# Altium PCB PCB1.PcbDoc
Units mil, origin at the board's own origin, x right, y up, seen from the top; angles counter-clockwise.
Board outline 4165 x 1725 mil, 2 copper layers (Top Layer, Bottom Layer); 14 components, 8 nets, 28 pads, 0 vias.
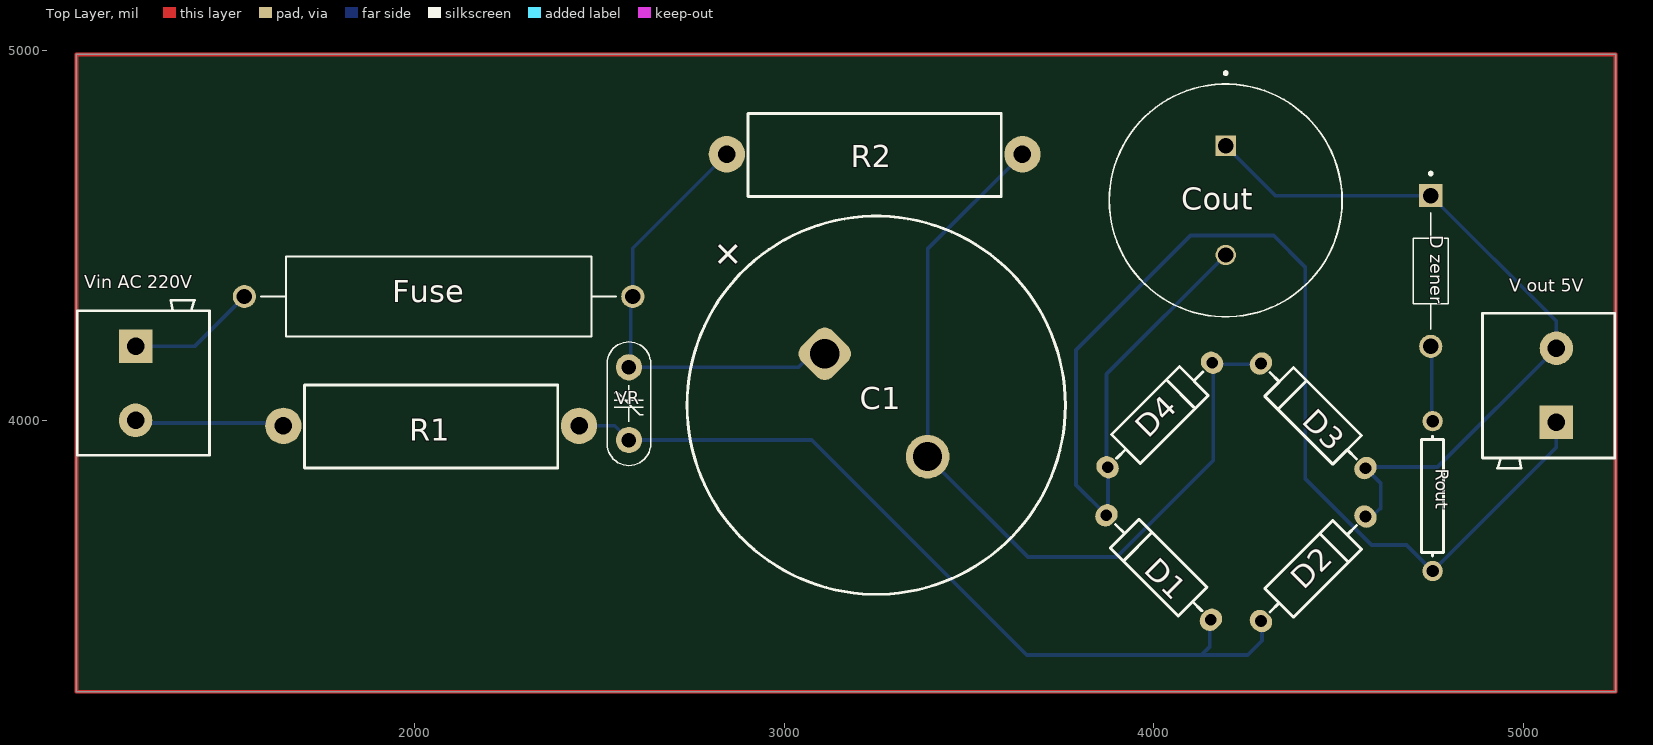
[diagram p0: Top Layer view]
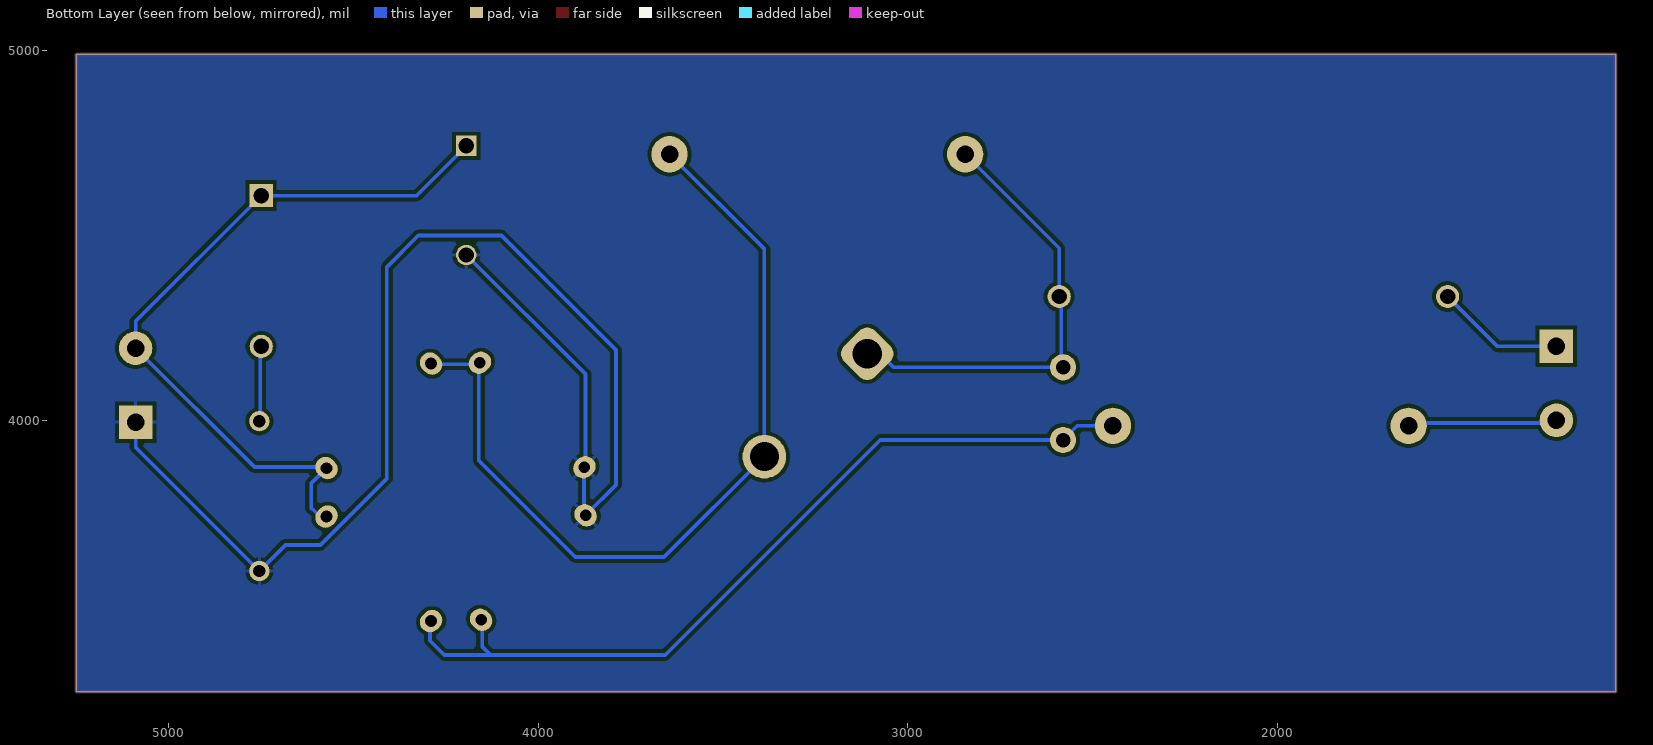
[diagram p1: Bottom Layer view, seen from below]
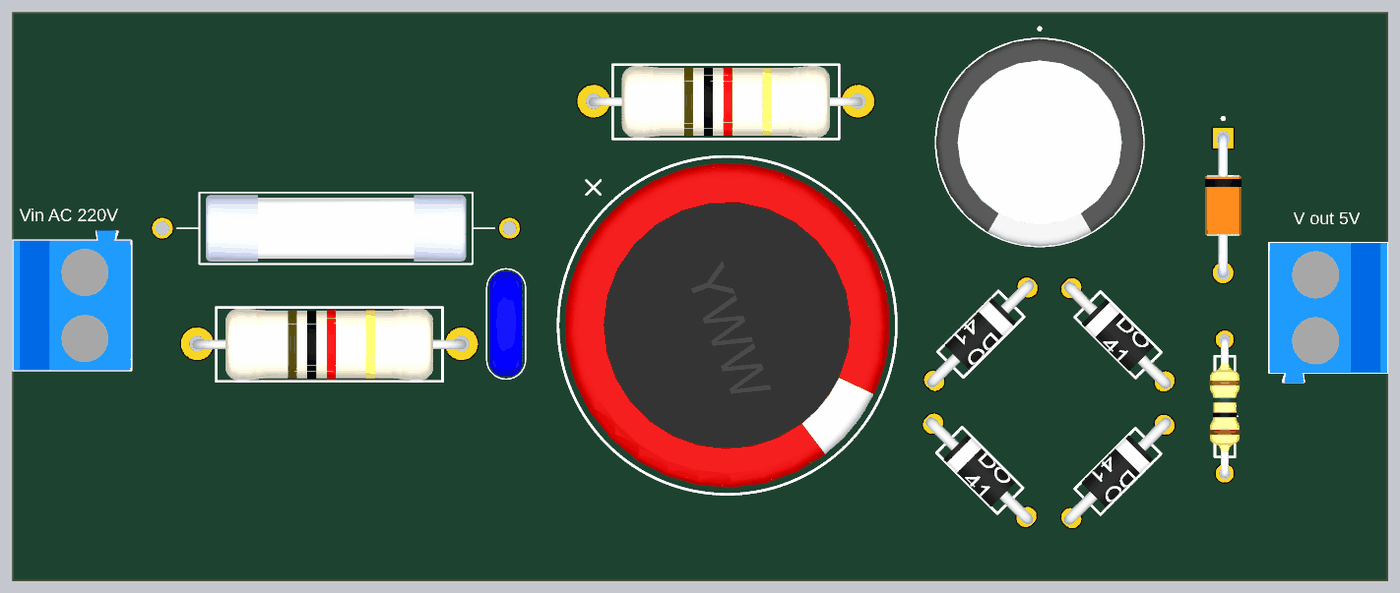
[diagram p2: 3D render of the assembled board from above, using the file's embedded part models]

## Layer stack, top to bottom
Top Solder: solder mask 0.4, Solder Resist, Dk 3.5
Top Layer: signal copper 1.4
Dielectric 1: dielectric 12.6, FR-4, Dk 4.8
Bottom Layer: signal copper 1.4
Bottom Solder: solder mask 0.4, Solder Resist, Dk 3.5

## Board outline
1085,3265 1085,4990 5250,4990 5250,3265

## Design rules (kind name [scope] priority, off if disabled: settings)
Clearance [All] p1: gap=10 ignorepadtopadclearanceinfootprint=FALSE
PolygonConnect [All] p1: connectstyle=Relief reliefconductorwidth=10 reliefentries=4 polygonreliefangle="90 Angle" airgapwidth=10
RoutingVias [All] p1: holewidth=28 width=19.68 viastyle="Through Hole" minholewidth=28 minwidth=11.81 maxholewidth=28 maxwidth=15.75
SolderMaskExpansion [All] p1: expansion=4 istentingtop=FALSE
SupplyNets "Schematic Supply Nets" [InNet('GND')] p1: voltage=0.000
Width [All] p1: maxlimit=10 minlimit=10 preferedwidth=10
30 further rules are at their usual default settings.

## Components (designator, comment, footprint, x,y, rotation, side; value= is the part's Value field where it differs from the comment)
C1 "680µF" WCAP-AIG8_D25H30 3249.19,4040.81 r135 top
Cout "EEUFR1H102" CAPPRD750W80D1600H2500 4195,4595 r270 top
D1 "1N4007 THD" D_AX04_DO41 4013.58,3601.42 r135 top value=1N4007
D2 "1N4007 THD" D_AX04_DO41 4431.84,3598.1 r45 top value=1N4007
D3 "1N4007 THD" D_AX04_DO41 4431.84,4012.15 r135 top value=1N4007
D4 "1N4007 THD" D_AX04_DO41 4016.87,4014.3 r45 top value=1N4007
"D zener" "1N4733G" DIOAD1036W73L450D282 4750,4403.94 r270 top
Fuse "fuse" FUSAD2668W81L2100D550 2065,4335 r0 top
R1 "Resistor THD" R2W_AX08 2045,3985 r0 top value=100
R2 "Resistor THD" R2W_AX08 3245,4720 r0 top value=470K
Rout "Resistor THD" Res_0.25w 4755,3795 r90 top value=100
"V out 5V" "Socket Blue 2" "Socket Blue 2" 5090,4095 r90 top
"Vin AC 220V" "Socket Blue 2" "Socket Blue 2" 1245,4100 r270 top
VR "VARISTOR" "07D XXX" 2580,4045 r270 top

## Footprints (in the part's own frame and the unit in brackets; to place one, negate y for a bottom-side part, rotate by r counter-clockwise, add the part's x,y. Pads: shape width x height; smd on the part's side, far side on the other; paste and mask are expansions set on the pad)
"07D XXX" [mm] "MOV-07DxxxK Metal Oxide Varistors (MOVs) are 7 mm  (Make www.tarahiboard.com)"
  round 1.8 hole 1: 1(2.5,0) 2(-2.5,0)
  silkscreen extent -4.25,-1.5 4.25,1.5, body extent -4,-1.26 4,1.25, height 11
CAPPRD750W80D1600H2500 [mm]
  round 1.4 hole 1.05: N(3.75,0)
  rect 1.4x1.4 hole 1.05: P(-3.75,0)
  silkscreen extent -8.85,-8 8,8, body extent -8,-8 8,8, height 25
D_AX04_DO41 [mm] "DIODE 0.4 INCH SPACING DO-41 (Make www.tarahiboard.com)"
  oval 1.4x1.6 hole 0.8: 1(-5.08,0) 2(5.08,0)
  silkscreen extent -4.2,-1.4 4.2,1.4, body extent -5.68,-1.32 5.68,1.4, height 2.86
DIOAD1036W73L450D282 [mm]
  round 1.59 hole 1.06: A(5.18,0)
  rect 1.59x1.59 / inner round 1.59 / far side rect 1.59x1.59 hole 1.06: C(-5.18,0)
  silkscreen extent -6.8,-1.2 4,1.2, body extent -5.55,-1.4 5.55,1.4, height 2.8
FUSAD2668W81L2100D550 [mm]
  round 1.59 hole 1.06: 1(-13.347,0) 2(13.347,0)
  silkscreen extent -12.2,-2.75 12.2,2.75, body extent -10,-2.55 10,2.55, height 5.1
R2W_AX08 [mm] "RESISTOR 2 WATT, AXIAL0.8 (Make www.tarahiboard.com)"
  round 2.5 hole 1.2: 1(-10.16,0) 2(10.16,0)
  silkscreen extent -8.7,-2.9 8.7,2.8, body extent -10.51,-2.8 10.51,2.7, height 5.5
Res_0.25w [mm] "(Make www.tarahiboard.com)"
  round 1.4 hole 0.85: 1(-5.155,0) 2(5.15,0)
  silkscreen extent -4.11,-0.76 4.11,0.76, body extent -5.46,-1.16 5.31,1.16, height 2.93
"Socket Blue 2" [mm] "(Make www.tarahiboard.com)"
  rect 2.3x2.3 hole 1.2: 1(-2.54,0)
  round 2.3 hole 1.2: 2(2.54,0)
  silkscreen extent -5.71,-4.01 4.95,5.08, body extent -5.78,-3.99 4.96,5.08, height 12.52
WCAP-AIG8_D25H30 [mm] "Aluminium Electrolytic Snap-In Capacitors, 25x30mm"
  rrect50% 3x3 hole 2: 1(5,0)
  round 3 hole 2: 2(-5,0)
  silkscreen extent -13,-13 13,13, body extent -17.68,-17.68 17.68,17.67, height 30.19

## Part data
C1: library part 861011084015, "WCAP-AIG8 Aluminum Electrolytic Capacitor, Snap-In, D25 x H30mm, 680µF, 200V", Capacitance Tolerance=+/-20%, Case/Size Code="D25 x H30mm", Leakage Current=2720µA, Manufacturer="Wurth Elektronik", Max Operating Temperature=85°C, Min Operating Temperature=-25°C, Rated Voltage (DC)=200V, Ripple Current=2.98A, Capacitance=680µF, Category="Aluminum Electrolytic Capacitors", ComponentLink1Description="Website Link", ComponentLink1URL=https://www.we-online.com/redexpert/article/861011084015?ad, ComponentLink2Description="Datasheet Link", ComponentLink2URL=https://www.we-online.com/redexpert/spec/861011084015?ad, Diameter=25mm, Dissipation Factor=15%, Endurance=2000h, Height=30mm, Manufacturer Part Number=861011084015, Match Code=WCAP-AIG8, Mount="Through Hole", Packaging=Tray, Technical Reference=ANAO300681M200DSIC3B000
Cout: "1000ÂµF 50V Aluminum Electrolytic Capacitors Radial, Can 10000 Hrs @ 105Â°C", Package="RADIAL-2 Panasonic", Availability="In Stock", Check_prices=https://www.snapeda.com/parts/EEUFR1H102/Panasonic/view-part/2301894/?ref=eda, MF=Panasonic, MP=EEUFR1H102, Price=None, SnapEDA_Link=https://www.snapeda.com/parts/EEUFR1H102/Panasonic/view-part/2301894/?ref=snap
D1 D2 D3 D4: "DIODE, GENERAL PURPOSE, 1000V/1A", ComponentLink1Description=Tarahiboard, ComponentLink1URL=https://www.tarahiboard.com/product/library-pack, DatasheetVersion=2022
"D zener": Package=None, Availability=Unavailable, MP=1N4733G, Price=None
Fuse: library part 5SFP-1-R, "1 A 250 V AC DC Fuse Cartridge, Glass Through Hole 5mm x 20mm (Axial)", Package="5mm-20 Bel Fuse Inc.", Check_prices=https://www.snapeda.com/parts/5SFP%201-R/Bel+Circuit+Protection/view-part/?ref=eda, MF="Bel Fuse", MP="5SFP 1-R", SnapEDA_Link=https://www.snapeda.com/parts/5SFP%201-R/Bel+Circuit+Protection/view-part/?ref=snap
VR: library part "VARISTOR (VDR)", "VARISTORS", ComponentLink1Description=Tarahiboard, ComponentLink1URL=https://www.tarahiboard.com/product/library-pack, DatasheetVersion=2022
R1 R2 Rout: ComponentLink1Description="Website: Tarahiboard", ComponentLink1URL=https://www.tarahiboard.com/product/library-pack, DatasheetVersion=2022
"V out 5V" "Vin AC 220V": ComponentLink1Description=Tarahiboard, ComponentLink1URL=https://www.tarahiboard.com/product/library-pack, DatasheetVersion=2022

## Nets (pads, with @x,y where several pads share a name; then routed paths per layer and width w, separated by ;. In a path a pad name is that pad's centre, name@x,y a point inside that pad or via, vN(x,y) a via of type N, cw(c..) or ccw(c..) an arc to the next point about the centre after c; other vN are vias at no path point)
GND: "V out 5V.1" Cout.N D1.2 D4.1 Rout.1 | length 3670.9
  Bottom Layer w10: Cout.N 3872.66,4125.03 3872.66,3875.66 D4.1 3876.59,3871.74 3876.59,3747.27 D1.2 3790,3825 3790,4190 4100,4500 4325,4500 4409.96,4415.04 4409.96,3842.64 4589.91,3662.68 4684.37,3662.68 Rout.1 4755,3595 4757.95,3595 5090,3927.05 5090,3995
NetC1_1: C1.1 Fuse.2 R2.1 VR.2 | length 1231.5
  Bottom Layer w10: R2.1 2590.49,4465.49 Fuse.2 2585.25,4329.75 2585.25,4148.67 VR.2 3038.74,4143.43 3075.31,4180 C1.1
NetC1_2: C1.2 D3.2 D4.2 R2.2 | length 2314.3
  Bottom Layer w10: R2.2 3388.39,4463.39 C1.2 3660,3630 3900,3630 4161.08,3891.08 D4.2@4161.08,4152.94 ; D4.2 4162.15,4151.86 4288.71,4151.86 D3.2
NetCout_P: "D zener.C" "V out 5V.2" Cout.P D2.2 D3.1 | length 1993.3
  Bottom Layer w10: Cout.P 4329.76,4607.87 4750,4607.87 5090,4267.87 5090,4195 4768.51,3873.51 4576.04,3873.51 D3.1 4615,3828.98 4615,3760.86 4612.11,3760.86 4590.78,3739.53 D2.2
NetD1_1: D1.1 D2.1 R1.2 VR.1 | length 2281.2
  Bottom Layer w10: R1.2 2541.57,3985 VR.1 3074.95,3946.57 3656.52,3365 4129.14,3365 ; D1.1 4152.22,3457.22 4152.22,3388.07 4129.14,3365 ; D2.1 4293.2,3453.9 4293.2,3403.2 4255,3365 4129.14,3365
"NetD zener_A": "D zener.A" Rout.2 | length 204.3
  Bottom Layer w10: 4750,4200 4752.5,4197.5 4752.5,4000.26 Rout.2
NetFuse_1: "Vin AC 220V.1" Fuse.1 | length 350.4
  Bottom Layer w10: 1245,4200 1404.51,4200 Fuse.1
NetR1_1: "Vin AC 220V.2" R1.1 | length 406.2
  Bottom Layer w10: 1245,4000 1252.5,3992.5 1637.5,3992.5 R1.1
copper on no net: | length 11780
  Top Layer w10: 1085,3265 5250,3265 5250,4990 1085,4990 1085,3265

## Polygon pours and split planes (outlines as drawn)
GND on Bottom Layer "GND_L02_P002" (solid, pour order 2): 1085,4990 1085,3265 5250,3265 5250,4990

## Text inside footprints (layer, text, board x,y; h text height)
C1: Top Overlay "+" at 2903.99,4441.69 h78.74 r135